# EAGLE board veter-cap (EAGLE 6.3)
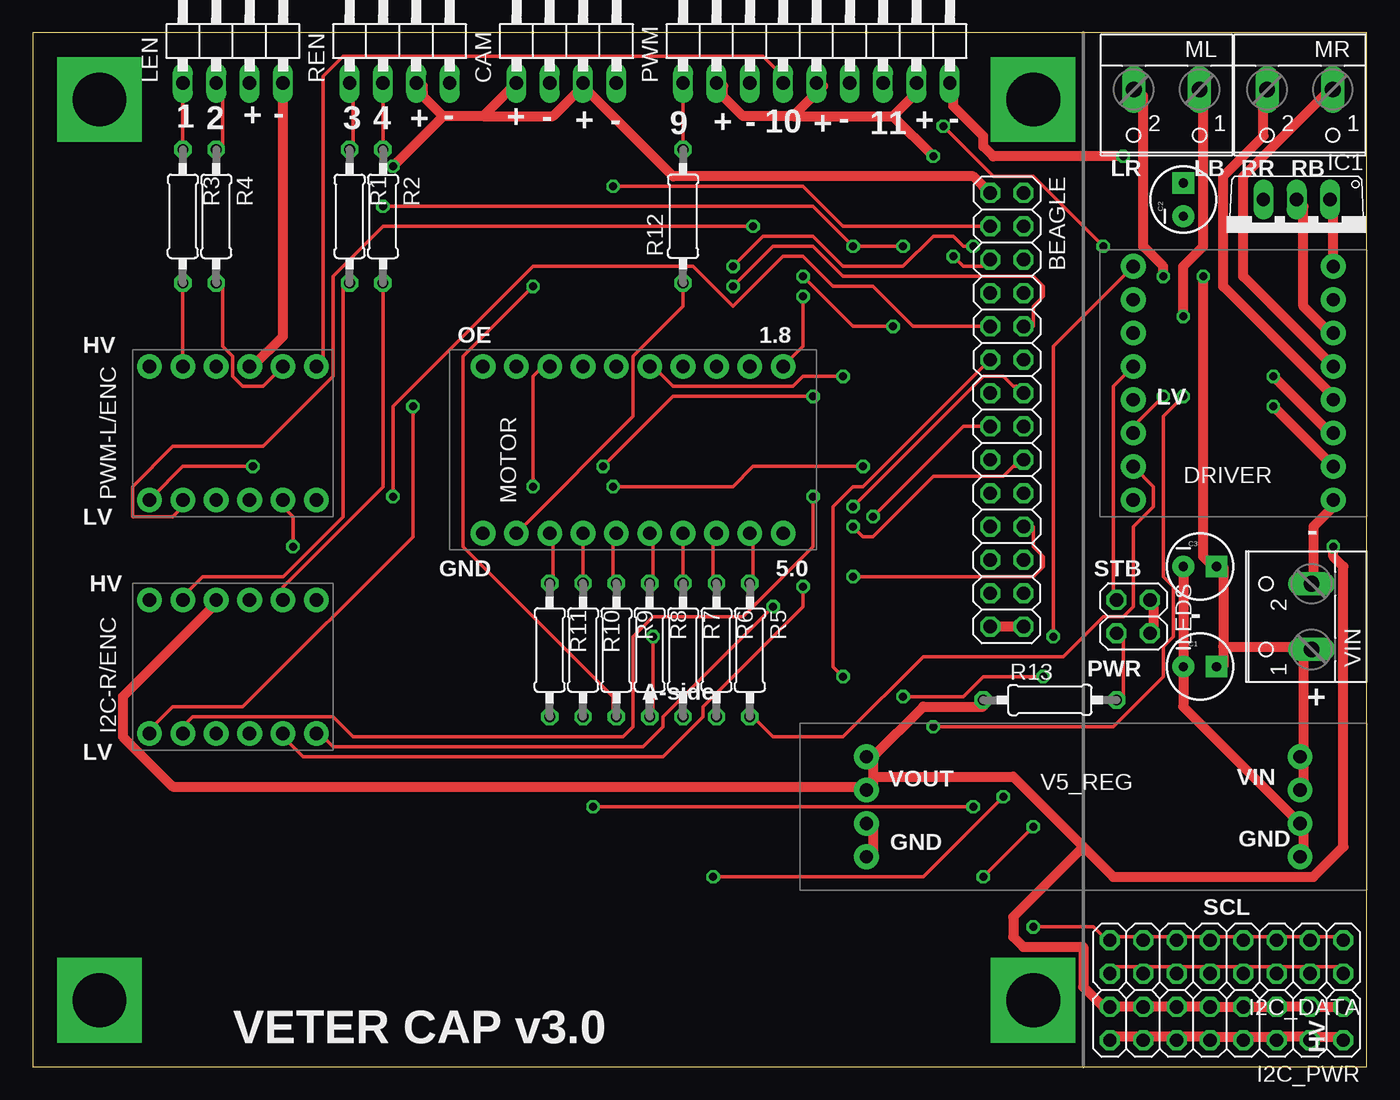
[diagram p0: board, top side]
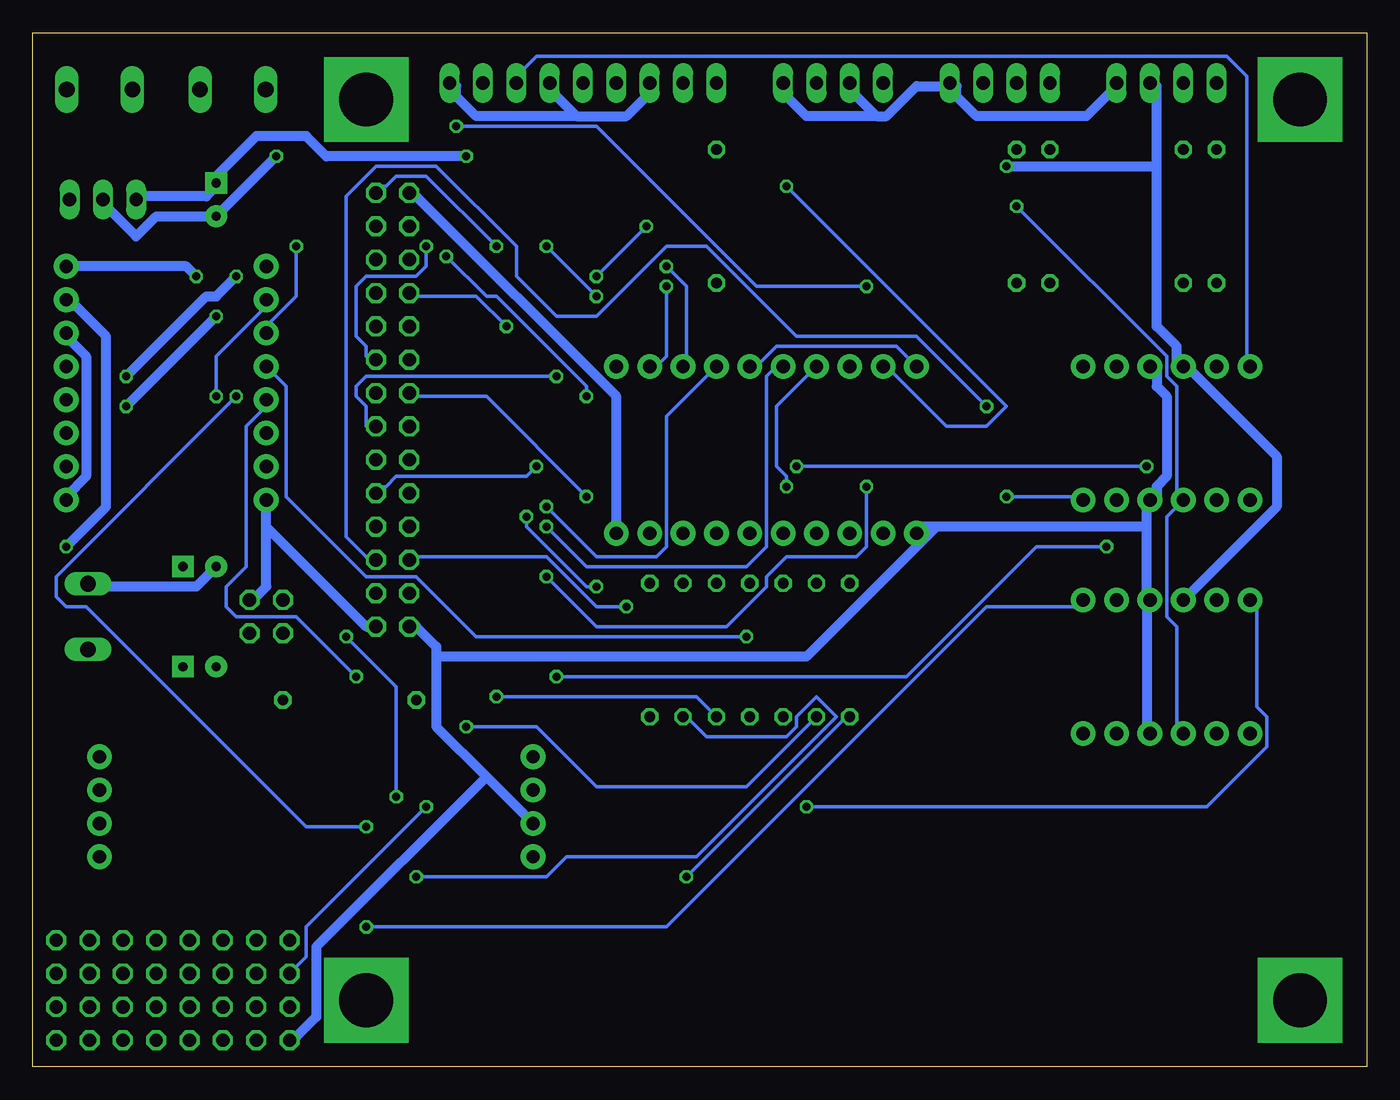
[diagram p1: board, bottom side, seen from below]

Size 101.6 x 78.74 mm. Coordinates in mm from the lower left corner, seen from the top.
Outline: 0,0 101.6,0 101.6,78.74 0,78.74 0,0
Copper layers (1*16): Top 0.035mm / dielectric 1.5mm / Bottom 0.035mm
Design rules "default": minimum track width 10mil, minimum drill 24mil, track to track 8mil, track to pad 8mil, pad to pad 8mil, via to via 8mil, smd to smd 8mil, copper to edge 40mil, drill to drill 12mil, minimum pad ring 10mil, minimum via ring 8mil, stop-mask expansion 4mil, vias tented up to drill 0mil, thermal gap 10mil
Net classes: 0 default: width 0.254 mm; 1 Supply: width 0.762 mm

## Footprints (pad centres in the part's own frame; a part is rotated, then mirrored left to right if it is on the bottom)
BEAGLE_PINH2X14 = drill 1.016 octagon: 1 1.27,16.51; 2 -1.27,16.51; 3 1.27,13.97; 4 -1.27,13.97; 5 1.27,11.43; 6 -1.27,11.43; 7 1.27,8.89; 8 -1.27,8.89; 9 1.27,6.35; 10 -1.27,6.35; 11 1.27,3.81; 12 -1.27,3.81; 13 1.27,1.27; 14 -1.27,1.27; 15 1.27,-1.27; 16 -1.27,-1.27; 17 1.27,-3.81; 18 -1.27,-3.81; 19 1.27,-6.35; 20 -1.27,-6.35; 21 1.27,-8.89; 22 -1.27,-8.89; 23 1.27,-11.43; 24 -1.27,-11.43; 25 1.27,-13.97; 26 -1.27,-13.97; 27 1.27,-16.51; 28 -1.27,-16.51
CPOL-RADIAL-10UF-25V = drill 0.7 pad 1.651 square: 1 1.27,0 | drill 0.7 pad 1.651: 2 -1.27,0
1X04/90 = drill 1.016 long: 1 -3.81,-3.81; 2 -1.27,-3.81; 3 1.27,-3.81; 4 3.81,-3.81
6612-BREAKOUT = drill 1.016 pad 1.88: 1 -7.62,-8.89; 2 -7.62,-6.35; 3 -7.62,-3.81; 4 -7.62,-1.27; 5 -7.62,1.27; 6 -7.62,3.81; 7 -7.62,6.35; 8 -7.62,8.89; 9 7.62,8.89; 10 7.62,6.35; 11 7.62,3.81; 12 7.62,1.27; 13 7.62,-1.27; 14 7.62,-3.81; 15 7.62,-6.35; 16 7.62,-8.89
BOB-08745-BREAKOUT = drill 1.016 pad 1.88: 1 -5.08,-6.35; 2 -5.08,-3.81; 3 -5.08,-1.27; 4 -5.08,1.27; 5 -5.08,3.81; 6 -5.08,6.35; 7 5.08,6.35; 8 5.08,3.81; 9 5.08,1.27; 10 5.08,-1.27; 11 5.08,-3.81; 12 5.08,-6.35
2X08 = drill 1.016 octagon: 1 -8.89,-1.27; 2 -8.89,1.27; 3 -6.35,-1.27; 4 -6.35,1.27; 5 -3.81,-1.27; 6 -3.81,1.27; 7 -1.27,-1.27; 8 -1.27,1.27; 9 1.27,-1.27; 10 1.27,1.27; 11 3.81,-1.27; 12 3.81,1.27; 13 6.35,-1.27; 14 6.35,1.27; 15 8.89,-1.27; 16 8.89,1.27
TO220V = drill 1.016 long: 1 -2.54,-2.54; 2 0,-2.54; 3 2.54,-2.54
2X02 = drill 1.016 octagon: 1 -1.27,-1.27; 2 -1.27,1.27; 3 1.27,-1.27; 4 1.27,1.27
BEAGLE-PAD = drill 4.1 pad 6.452 square: B4,1 0,0
W237-102 = drill 1.194 long: 1 -2.5,-1.27; 2 2.5,-1.27
TXB0108-BREAKOUT = drill 1.016 pad 1.88: 1 -6.35,-11.43; 2 -6.35,-8.89; 3 -6.35,-6.35; 4 -6.35,-3.81; 5 -6.35,-1.27; 6 -6.35,1.27; 7 -6.35,3.81; 8 -6.35,6.35; 9 -6.35,8.89; 10 -6.35,11.43; 11 6.35,11.43; 12 6.35,8.89; 13 6.35,6.35; 14 6.35,3.81; 15 6.35,1.27; 16 6.35,-1.27; 17 6.35,-3.81; 18 6.35,-6.35; 19 6.35,-8.89; 20 6.35,-11.43
1X09/90 = drill 1.016 long: 1 -10.16,-3.81; 2 -7.62,-3.81; 3 -5.08,-3.81; 4 -2.54,-3.81; 5 0,-3.81; 6 2.54,-3.81; 7 5.08,-3.81; 8 7.62,-3.81; 9 10.16,-3.81
0207/10 = drill 0.813 octagon: 1 -5.08,0; 2 5.08,0
D15V35F5S3-BREAKOUT = drill 1.016 pad 1.88: 1 -16.51,-3.81; 2 -16.51,-1.27; 3 -16.51,1.27; 4 -16.51,3.81; 5 16.51,3.81; 6 16.51,1.27; 7 16.51,-1.27; 8 16.51,-3.81

## Placement (x,y rotation side)
BEAGLE  EXPANSION  [BEAGLE_PINH2X14]  74.19,50.04 0 top
C1  100uF  [CPOL-RADIAL-10UF-25V]  88.9,30.48 0 top
C2  10uF  [CPOL-RADIAL-10UF-25V]  87.63,66.04 90 top
C3  10uF  [CPOL-RADIAL-10UF-25V]  88.9,38.1 0 top
CAM  PWR  [1X04/90]  40.64,78.74 0 top
DRIVER  TB6612FNG  [6612-BREAKOUT]  91.44,52.07 0 top
FRAME1  FRAME-LETTER  [CREATIVE_COMMONS]  -77.47,59.69 0 top  (outside the outline)
I2C-R/ENC  BOB-08745  [BOB-08745-BREAKOUT]  15.24,30.48 90 top
I2C_DATA  [2X08]  90.93,8.38 180 top
I2C_PWR  [2X08]  90.93,3.3 180 top
IC1  7805TV  [TO220V]  96.27,63.5 180 top
LEDS  5V LEDS  [2X02]  83.82,34.29 270 top
LEFT-BOTTOM  BEAGLE-PAD  [BEAGLE-PAD]  5.08,5.08 0 top
LEFT-TOP  BEAGLE-PAD  [BEAGLE-PAD]  5.08,73.66 0 top
LEN  LEFT  [1X04/90]  15.24,78.74 0 top
ML  LEFT  [W237-102]  86.36,73.15 180 top
MOTOR  TXB0108  [TXB0108-BREAKOUT]  45.72,46.99 270 top
MR  RIGHT  [W237-102]  96.52,73.15 180 top
PWM  PWM  [1X09/90]  59.69,78.74 0 top
PWM-L/ENC  BOB-08745  [BOB-08745-BREAKOUT]  15.24,48.26 90 top
R1  8K2  [0207/10]  24.13,64.77 270 top
R2  8K2  [0207/10]  26.67,64.77 270 top
R3  8K2  [0207/10]  11.43,64.77 270 top
R4  8K2  [0207/10]  13.97,64.77 270 top
R5  560  [0207/10]  54.61,31.75 270 top
R6  560  [0207/10]  52.07,31.75 270 top
R7  560  [0207/10]  49.53,31.75 270 top
R8  560  [0207/10]  46.99,31.75 270 top
R9  560  [0207/10]  44.45,31.75 270 top
R10  560  [0207/10]  41.91,31.75 270 top
R11  560  [0207/10]  39.37,31.75 270 top
R12  560  [0207/10]  49.53,64.77 90 top
R13  560  [0207/10]  77.47,27.94 0 top
REN  RIGHT  [1X04/90]  27.94,78.74 0 top
RIGHT-BOTTOM  BEAGLE-PAD  [BEAGLE-PAD]  76.2,5.08 0 top
RIGHT-TOP  BEAGLE-PAD  [BEAGLE-PAD]  76.2,73.66 0 top
V5_REG  D15V35F5S3  [D15V35F5S3-BREAKOUT]  80.01,19.81 180 top
VIN  INPUT  [W237-102]  96.14,34.29 90 top

## Library data of the parts
BEAGLE DRIVER I2C-R/ENC LEFT-BOTTOM LEFT-TOP MOTOR PWM-L/ENC RIGHT-BOTTOM RIGHT-TOP V5_REG = veter
C1-C3 = SparkFun-Passives
CAM I2C_DATA I2C_PWR LEDS LEN PWM REN = pinhead
FRAME1 = SparkFun-Aesthetics
IC1 = linear
ML MR VIN = con-wago-500; MPN: 237-102; OC_FARNELL: unknown; OC_NEWARK: 70K9898
R1-R13 = resistor

## Nets
+1V8: BEAGLE.1 I2C-R/ENC.4 MOTOR.10 PWM-L/ENC.4
+5V [Supply]: BEAGLE.2 CAM.1 CAM.3 DRIVER.10 I2C-R/ENC.9 I2C_PWR.1 I2C_PWR.3 I2C_PWR.5 I2C_PWR.7 I2C_PWR.9 I2C_PWR.11 I2C_PWR.13 I2C_PWR.15 LEN.3 MOTOR.11 PWM-L/ENC.9 R13.1 REN.3 V5_REG.7 V5_REG.8
+5V_SERVO [Supply]: C2.1 IC1.3 PWM.2 PWM.5 PWM.8
ENC1_143: PWM-L/ENC.8 R3.2
ENC2_158: PWM-L/ENC.11 R4.2
ENC3_162: I2C-R/ENC.8 R1.2
ENC4_161: I2C-R/ENC.11 R2.2
GPIO_130: BEAGLE.21 MOTOR.3
GPIO_131: BEAGLE.19 MOTOR.4
GPIO_132: BEAGLE.17 MOTOR.5
GPIO_133: BEAGLE.15 MOTOR.1 MOTOR.6
GPIO_134: BEAGLE.13 MOTOR.7
GPIO_135: BEAGLE.11 MOTOR.8
GPIO_136: BEAGLE.9 MOTOR.9
GPIO_143: BEAGLE.8 PWM-L/ENC.5
GPIO_144: BEAGLE.4 MOTOR.2
GPIO_145: BEAGLE.10 PWM-L/ENC.1
GPIO_146: BEAGLE.6 PWM-L/ENC.6
GPIO_158: BEAGLE.12 PWM-L/ENC.2
GPIO_161: BEAGLE.16 I2C-R/ENC.2
GPIO_162: BEAGLE.14 I2C-R/ENC.5
GPIO_168: BEAGLE.24 I2C-R/ENC.1
GPIO_183: BEAGLE.23 I2C-R/ENC.6
I2C_SCL: I2C-R/ENC.12 I2C_DATA.1 I2C_DATA.3 I2C_DATA.5 I2C_DATA.7 I2C_DATA.9 I2C_DATA.11 I2C_DATA.13 I2C_DATA.15
I2C_SDA: I2C-R/ENC.7 I2C_DATA.2 I2C_DATA.4 I2C_DATA.6 I2C_DATA.8 I2C_DATA.10 I2C_DATA.12 I2C_DATA.14 I2C_DATA.16
N$1: MOTOR.12 R5.1
N$2: MOTOR.13 R6.1
N$3: MOTOR.14 R7.1
N$4: MOTOR.15 R8.1
N$5: MOTOR.16 R9.1
N$6: MOTOR.17 R10.1
N$7: MOTOR.18 R11.1
N$8 [Supply]: DRIVER.14 ML.2
N$9 [Supply]: DRIVER.15 ML.1
N$10 [Supply]: DRIVER.13 MR.2
N$11 [Supply]: DRIVER.12 MR.1
N$12: R1.1 REN.1
N$13: R2.1 REN.2
N$14: LEN.1 R3.1
N$15: LEN.2 R4.1
N$16: MOTOR.19 R12.1
N$17: DRIVER.2 R5.2
N$18: DRIVER.3 R6.2
N$19: DRIVER.4 R7.2
N$20: DRIVER.5 LEDS.1 R8.2
N$21: DRIVER.6 R9.2
N$22: DRIVER.7 R10.2
N$23: DRIVER.8 R11.2
N$24: LEDS.3 R13.2
OE [Supply]: BEAGLE.27 BEAGLE.28 CAM.2 CAM.4 DRIVER.1 I2C-R/ENC.3 I2C-R/ENC.10 I2C_PWR.2 I2C_PWR.4 I2C_PWR.6 I2C_PWR.8 I2C_PWR.10 I2C_PWR.12 I2C_PWR.14 I2C_PWR.16 LEDS.2 LEDS.4 LEN.4 MOTOR.20 PWM-L/ENC.3 PWM-L/ENC.10 REN.4 V5_REG.5 V5_REG.6
PE [Supply]: C1.2 C2.2 C3.2 DRIVER.11 DRIVER.16 IC1.2 PWM.3 PWM.6 PWM.9 V5_REG.3 V5_REG.4 VIN.2
PWM9: PWM.1 R12.2
PWM10: PWM-L/ENC.12 PWM.4
PWM11: PWM-L/ENC.7 PWM.7
VBAT [Supply]: C1.1 C3.1 DRIVER.9 IC1.1 V5_REG.1 V5_REG.2 VIN.1

## Tracks (layer width: path | path; a pad name or v marks a point on that pad's centre or on a via)
+1V8  (via drill 0.61)
  Top 0.254: v66.29,62.48 v62.48,62.48 59.44,65.53 v26.67,65.53 | v58.67,58.67 58.67,54.86 MOTOR.10
  Bottom 0.254: I2C-R/ENC.4 14.48,25.91 14.48,33.53 15.24,34.29 15.24,41.91 14.48,42.67 PWM-L/ENC.4 14.48,43.43 14.48,51.82 15.24,52.58 15.24,54.1 v26.67,65.53 | v66.29,62.48 71.63,67.82 73.91,67.82 74.68,67.06 75.44,67.06 BEAGLE.1 | v58.67,58.67 v62.48,62.48
+5V  (via drill 0.61)
  Top 0.762: I2C_PWR.1 97.54,4.57 I2C_PWR.3 96.77,4.57 95.25,4.57 I2C_PWR.5 94.49,4.57 I2C_PWR.7 89.92,4.57 I2C_PWR.9 89.15,4.57 87.63,4.57 I2C_PWR.11 86.87,4.57 I2C_PWR.13 82.3,4.57 I2C_PWR.15 81.53,4.57 80.01,6.1 80.01,9.14 75.44,9.14 74.68,9.91 74.68,11.43 80.01,16.76 | 64.01,23.62 67.82,27.43 72.39,27.43 R13.1 | 64.01,23.62 V5_REG.8 64.01,23.62 | 64.01,23.62 64.01,22.1 | 64.01,22.1 64.01,21.34 V5_REG.7 63.25,21.34 10.67,21.34 6.86,25.15 6.86,28.19 13.72,35.05 I2C-R/ENC.9 | v99.06,39.62 99.06,38.86 99.82,38.1 99.82,16.76 97.54,14.48 82.3,14.48 80.01,16.76 | 80.01,16.76 74.68,22.1 64.01,22.1 | 31.24,72.39 29.72,73.91 29.72,74.68 REN.3 | 34.29,72.39 31.24,72.39 | 34.29,72.39 36.58,74.68 CAM.1 | 41.91,74.68 39.62,72.39 34.29,72.39 | 41.91,74.68 CAM.3 41.91,74.68 | 41.91,74.68 48.77,67.82 71.63,67.82 72.39,67.06 BEAGLE.2 | 31.24,72.39 v27.43,68.58
  Bottom 0.762: v99.06,39.62 96.01,42.67 96.01,55.63 98.3,57.91 99.06,57.91 DRIVER.10 | 16,68.58 16,56.39 14.48,54.86 14.48,53.34 PWM-L/ENC.9 13.72,53.34 6.86,46.48 6.86,42.67 13.72,35.81 I2C-R/ENC.9 | 16,68.58 16,74.68 LEN.3 | BEAGLE.2 72.39,66.29 57.15,51.05 57.15,41.15 MOTOR.11 | v27.43,68.58 16,68.58
+5V_SERVO  (via drill 0.61)
  Top 0.762: 57.91,72.39 54.1,72.39 52.58,73.91 52.58,74.68 PWM.2 | 57.91,72.39 60.2,74.68 PWM.5 | 65.53,72.39 67.06,73.91 67.06,74.68 PWM.8 | 57.91,72.39 65.53,72.39 | 65.53,72.39 v68.58,69.34
  Bottom 0.762: IC1.3 93.73,66.29 88.39,66.29 87.63,67.06 C2.1 87.63,67.82 84.58,70.87 80.77,70.87 79.25,69.34 v68.58,69.34
ENC1_143
  Top 0.254: PWM-L/ENC.8 11.43,59.44 R3.2
ENC2_158
  Top 0.254: PWM-L/ENC.11 17.53,51.82 16,51.82 15.24,52.58 15.24,54.1 14.48,54.86 14.48,59.44 R4.2
ENC3_162
  Top 0.254: R1.2 23.62,59.44 23.62,41.91 19.05,37.34 12.95,37.34 11.43,35.81 I2C-R/ENC.8
ENC4_161
  Top 0.254: R2.2 26.67,59.44 26.67,44.2 19.05,36.58 19.05,35.81 I2C-R/ENC.11
GPIO_130  (via drill 0.61)
  Top 0.254: v62.48,37.34 76.2,37.34 76.96,38.1 76.96,38.86 76.2,39.62 76.2,41.15 BEAGLE.21 | v38.1,44.2 38.1,52.58 38.86,53.34 MOTOR.3
  Bottom 0.254: v62.48,37.34 58.67,33.53 48.77,33.53 45.72,36.58 45.72,37.34 44.2,38.86 38.86,38.86 38.1,39.62 v38.1,44.2
GPIO_131  (via drill 0.61)
  Top 0.254: v63.25,45.72 54.86,45.72 53.34,44.2 v44.2,44.2
  Bottom 0.254: v63.25,45.72 64.01,44.96 73.91,44.96 74.68,44.2 75.44,44.2 BEAGLE.19 | v44.2,44.2 44.2,44.96 44.96,45.72 44.96,50.29 MOTOR.4
GPIO_132  (via drill 0.61)
  Top 0.254: v62.48,41.15 63.25,40.39 64.01,40.39 68.58,44.96 73.91,44.96 74.68,45.72 75.44,45.72 BEAGLE.17
  Bottom 0.254: v62.48,41.15 59.44,38.1 47.24,38.1 45.72,39.62 45.72,52.58 44.96,53.34 MOTOR.5
GPIO_133  (via drill 0.61)
  Top 0.254: v61.72,52.58 58.67,52.58 57.91,51.82 48.77,51.82 47.24,53.34 MOTOR.6
  Bottom 0.254: v61.72,52.58 76.2,52.58 76.96,51.82 76.96,51.05 76.2,50.29 76.2,48.77 BEAGLE.15 | MOTOR.1 35.81,54.86 44.96,54.86 46.48,53.34 MOTOR.6
GPIO_134  (via drill 0.61)
  Top 0.254: v62.48,42.67 72.39,52.58 73.91,52.58 74.68,51.82 75.44,51.82 BEAGLE.13
  Bottom 0.254: v62.48,42.67 58.67,38.86 54.1,38.86 53.34,39.62 53.34,49.53 MOTOR.7
GPIO_135  (via drill 0.61)
  Top 0.254: v71.63,62.48 70.87,62.48 70.1,63.25 68.58,63.25 66.29,60.96 61.72,60.96 59.44,63.25 55.63,63.25 v53.34,60.96
  Bottom 0.254: v71.63,62.48 71.63,60.96 72.39,60.2 76.2,60.2 76.96,59.44 76.96,55.63 76.2,54.86 76.2,54.1 BEAGLE.11 | v53.34,60.96 51.82,59.44 51.82,53.34 MOTOR.8
GPIO_136  (via drill 0.61)
  Top 0.254: v53.34,59.44 56.39,62.48 59.44,62.48 61.72,60.2 76.2,60.2 76.96,59.44 76.96,58.67 76.2,57.91 76.2,56.39 BEAGLE.9
  Bottom 0.254: v53.34,59.44 53.34,54.1 54.1,53.34 MOTOR.9
GPIO_143  (via drill 0.61)
  Top 0.254: v65.53,56.39 62.48,56.39 v58.67,60.2 | v54.86,64.01 26.67,64.01 22.86,60.2 22.86,52.58 17.53,47.24 10.67,47.24 7.62,44.2 7.62,41.91 10.67,41.91 11.43,42.67 PWM-L/ENC.5
  Bottom 0.254: v65.53,56.39 67.82,58.67 72.39,58.67 BEAGLE.8 | v54.86,64.01 v58.67,60.2
GPIO_144  (via drill 0.61)
  Top 0.254: v44.2,67.06 58.67,67.06 61.72,64.01 72.39,64.01 BEAGLE.4
  Bottom 0.254: v44.2,67.06 27.43,50.29 28.96,48.77 32,48.77 36.58,53.34 MOTOR.2
GPIO_145  (via drill 0.61)
  Top 0.254: v27.43,43.43 27.43,50.29 38.1,60.96 50.29,60.96 53.34,57.91 57.15,61.72 58.67,61.72 60.96,59.44 64.01,59.44 67.06,56.39 72.39,56.39 BEAGLE.10
  Bottom 0.254: v27.43,43.43 22.1,43.43 PWM-L/ENC.1
GPIO_146  (via drill 0.61)
  Top 0.254: v70.1,61.72 70.87,60.96 72.39,60.96 BEAGLE.6 | v59.44,51.05 48.77,51.05 v43.43,45.72 | v16.76,45.72 11.43,45.72 9.14,43.43 PWM-L/ENC.6
  Bottom 0.254: v70.1,61.72 67.06,58.67 66.29,58.67 59.44,51.82 v59.44,51.05 | v16.76,45.72 v43.43,45.72
GPIO_158  (via drill 0.61)
  Top 0.254: v61.72,29.72 60.96,30.48 60.96,42.67 62.48,44.2 63.25,44.2 72.39,53.34 BEAGLE.12 | v19.81,39.62 19.81,41.91 19.05,42.67 PWM-L/ENC.2
  Bottom 0.254: v61.72,29.72 35.05,29.72 25.15,39.62 v19.81,39.62
GPIO_161  (via drill 0.61)
  Top 0.254: v64.01,41.91 70.87,48.77 72.39,48.77 BEAGLE.16 | v58.67,36.58 58.67,35.05 51.05,27.43 51.05,26.67 48.01,23.62 20.57,23.62 19.05,25.15 I2C-R/ENC.2
  Bottom 0.254: v64.01,41.91 64.01,41.15 59.44,36.58 v58.67,36.58
GPIO_162  (via drill 0.61)
  Top 0.254: v59.44,43.43 59.44,39.62 54.1,34.29 47.24,34.29 45.72,32.77 45.72,25.91 44.96,25.15 24.38,25.15 22.86,26.67 12.19,26.67 11.43,25.91 I2C-R/ENC.5
  Bottom 0.254: v59.44,43.43 67.06,51.05 72.39,51.05 BEAGLE.14
GPIO_168  (via drill 0.61)
  Top 0.254: v56.39,35.05 48.01,26.67 48.01,25.91 46.48,24.38 22.86,24.38 22.1,25.15 I2C-R/ENC.1
  Bottom 0.254: v56.39,35.05 58.67,35.05 62.48,38.86 72.39,38.86 BEAGLE.24
GPIO_183  (via drill 0.61)
  Top 0.254: v28.96,50.29 28.96,40.39 16,27.43 10.67,27.43 9.14,25.91 I2C-R/ENC.6
  Bottom 0.254: v28.96,50.29 34.29,55.63 43.43,55.63 50.29,62.48 53.34,62.48 58.67,57.15 61.72,57.15 64.77,60.2 64.77,62.48 70.87,68.58 75.44,68.58 77.72,66.29 77.72,40.39 76.2,38.86 BEAGLE.23
I2C_SCL  (via drill 0.61)
  Top 0.254: 92.2,9.91 89.92,9.91 I2C_DATA.9 89.15,9.91 87.63,9.91 I2C_DATA.11 86.87,9.91 84.58,9.91 | 92.2,9.91 I2C_DATA.7 92.2,9.91 | I2C_DATA.1 99.82,9.91 97.54,9.91 I2C_DATA.3 96.77,9.91 95.25,9.91 I2C_DATA.5 94.49,9.91 92.2,9.91 | 84.58,9.91 82.3,9.91 I2C_DATA.15 81.53,9.91 80.77,10.67 v76.2,10.67 | 84.58,9.91 I2C_DATA.13 84.58,9.91
  Bottom 0.254: v76.2,10.67 53.34,10.67 28.96,35.05 22.1,35.05 I2C-R/ENC.12
I2C_SDA  (via drill 0.61)
  Top 0.254: 92.2,7.62 89.92,7.62 I2C_DATA.10 89.15,7.62 87.63,7.62 I2C_DATA.12 86.87,7.62 84.58,7.62 | 92.2,7.62 I2C_DATA.8 92.2,7.62 | I2C_DATA.2 99.82,7.62 97.54,7.62 I2C_DATA.4 96.77,7.62 95.25,7.62 I2C_DATA.6 94.49,7.62 92.2,7.62 | 84.58,7.62 82.3,7.62 I2C_DATA.16 | 84.58,7.62 I2C_DATA.14 84.58,7.62 | v71.63,19.81 v42.67,19.81
  Bottom 0.254: v42.67,19.81 12.19,19.81 7.62,24.38 7.62,26.67 8.38,27.43 8.38,35.05 I2C-R/ENC.7 | v71.63,19.81 80.77,10.67 80.77,8.38 81.53,7.62 I2C_DATA.16
N$1
  Top 0.254: R5.1 54.86,37.34 54.86,40.39 MOTOR.12
N$2
  Top 0.254: R6.1 51.82,37.34 51.82,40.39 MOTOR.13
N$3
  Top 0.254: R7.1 49.53,37.34 49.53,40.39 MOTOR.14
N$4
  Top 0.254: R8.1 47.24,37.34 47.24,40.39 MOTOR.15
N$5
  Top 0.254: R9.1 44.2,37.34 44.2,40.39 MOTOR.16
N$6
  Top 0.254: R10.1 41.91,37.34 41.91,40.39 MOTOR.17
N$7
  Top 0.254: R11.1 39.62,37.34 39.62,40.39 MOTOR.18
N$8  (via drill 0.61)
  Top 0.762: v86.11,60.2 86.11,60.96 84.58,62.48 84.58,73.91 ML.2 | v94.49,52.58 99.06,48.01 DRIVER.14
  Bottom 0.762: v86.11,60.2 87.63,58.67 88.39,58.67 v94.49,52.58
N$9  (via drill 0.61)
  Top 0.762: v87.63,57.15 87.63,60.96 89.15,62.48 89.15,73.91 ML.1 | DRIVER.15 v94.49,50.29
  Bottom 0.762: v94.49,50.29 v87.63,57.15
N$10
  Top 0.762: MR.2 93.73,73.91 93.73,70.87 90.68,67.82 90.68,59.44 99.06,51.05 DRIVER.13
N$11
  Top 0.762: DRIVER.12 92.2,60.2 92.2,67.82 98.3,73.91 MR.1
N$12
  Top 0.254: R1.1 24.38,70.1 24.38,74.68 REN.1
N$13
  Top 0.254: R2.1 26.67,70.1 26.67,74.68 REN.2
N$14
  Top 0.254: R3.1 11.43,70.1 11.43,74.68 LEN.1
N$15
  Top 0.254: R4.1 14.48,70.1 14.48,74.68 LEN.2
N$16
  Top 0.254: R12.1 49.53,59.44 49.53,57.91 45.72,54.1 45.72,49.53 37.34,41.15 MOTOR.19
N$17
  Top 0.254: DRIVER.2 85.34,44.2 85.34,42.67 83.82,41.15 83.82,35.05 83.06,34.29 81.53,34.29 78.49,31.24 67.82,31.24 61.72,25.15 56.39,25.15 54.86,26.67 R5.2
N$18  (via drill 0.61)
  Top 0.254: v76.2,18.29 v72.39,14.48 | v86.11,51.05 83.82,48.77 DRIVER.3
  Bottom 0.254: v72.39,14.48 62.48,14.48 60.96,16 51.05,16 40.39,26.67 41.91,28.19 43.43,26.67 43.43,25.91 44.2,25.15 50.29,25.15 51.82,26.67 R6.2 | v76.2,18.29 80.77,18.29 97.54,35.05 99.06,35.05 99.82,35.81 99.82,37.34 v86.11,51.05
N$19  (via drill 0.61)
  Top 0.254: v66.29,28.19 70.87,28.19 72.39,29.72 v76.96,29.72
  Bottom 0.254: R7.2 51.05,28.19 v66.29,28.19 | v76.96,29.72 81.53,34.29 86.11,34.29 86.87,35.05 86.87,36.58 85.34,38.1 85.34,48.77 83.82,50.29 DRIVER.4
N$20  (via drill 0.61)
  Top 0.254: v47.24,32.77 47.24,26.67 R8.2 | DRIVER.5 82.3,51.82 82.3,35.81 LEDS.1
  Bottom 0.254: v47.24,32.77 67.82,32.77 72.39,37.34 76.2,37.34 82.3,43.43 82.3,51.82 DRIVER.5
N$21  (via drill 0.61)
  Top 0.254: v38.1,59.44 32.77,54.1 32.77,39.62 44.2,28.19 44.2,26.67 R9.2 | v69.34,71.63 73.15,67.82 76.2,67.82 v81.53,62.48
  Bottom 0.254: v38.1,59.44 46.48,59.44 58.67,71.63 v69.34,71.63 | v81.53,62.48 81.53,58.67 83.82,56.39 DRIVER.6
N$22  (via drill 0.61)
  Top 0.254: v68.58,25.91 82.3,25.91 86.11,29.72 86.11,32 86.87,32.77 86.87,36.58 86.11,37.34 86.11,49.53 v87.63,51.05
  Bottom 0.254: R10.2 47.24,21.34 58.67,21.34 63.25,25.91 v68.58,25.91 | v87.63,51.05 87.63,54.1 83.82,57.91 DRIVER.7
N$23  (via drill 0.61)
  Top 0.254: v51.82,14.48 67.82,14.48 v73.91,20.57 | v77.72,32.77 77.72,54.86 DRIVER.8
  Bottom 0.254: v51.82,14.48 39.62,26.67 R11.2 | v73.91,20.57 73.91,28.96 v77.72,32.77
N$24
  Top 0.254: R13.2 83.06,28.19 83.06,32.77 LEDS.3
OE
  Top 0.762: I2C_PWR.2 99.82,2.29 97.54,2.29 I2C_PWR.4 96.77,2.29 95.25,2.29 I2C_PWR.6 94.49,2.29 92.2,2.29 | 84.58,2.29 82.3,2.29 I2C_PWR.16 | 84.58,2.29 I2C_PWR.14 84.58,2.29 | 92.2,2.29 89.92,2.29 I2C_PWR.10 89.15,2.29 87.63,2.29 I2C_PWR.12 86.87,2.29 84.58,2.29 | 92.2,2.29 I2C_PWR.8 92.2,2.29 | V5_REG.5 64.01,16 64.01,18.29 V5_REG.6 | BEAGLE.28 73.15,33.53 75.44,33.53 BEAGLE.27 | LEDS.4 85.34,33.53 85.34,35.05 LEDS.2 | 16.76,53.34 19.05,55.63 19.05,74.68 LEN.4 | 16.76,53.34 PWM-L/ENC.10 | 16.76,53.34 PWM-L/ENC.10 | 16.76,53.34 PWM-L/ENC.10 | 34.29,41.15 MOTOR.20 34.29,41.15 | 16.76,43.43 PWM-L/ENC.3 16.76,43.43 | 16.76,35.81 I2C-R/ENC.10 16.76,35.81
  Bottom 0.762: 83.82,41.15 83.82,36.58 84.58,35.81 LEDS.2 | 83.82,41.15 83.82,42.67 DRIVER.1 | 83.82,41.15 76.2,33.53 BEAGLE.27 | 67.06,22.1 70.87,25.91 70.87,31.24 | 67.06,22.1 64.01,19.05 V5_REG.6 | 70.87,31.24 70.87,32 72.39,33.53 BEAGLE.28 | 67.06,22.1 80.01,9.14 80.01,3.81 81.53,2.29 I2C_PWR.16 | I2C-R/ENC.3 16.76,25.91 16.76,35.05 I2C-R/ENC.10 16.76,35.81 16.76,41.15 | 16.76,41.15 16.76,42.67 PWM-L/ENC.3 16,43.43 16,44.2 15.24,44.96 15.24,51.05 16,51.82 16,53.34 PWM-L/ENC.10 | 16.76,41.15 32.77,41.15 | 32.77,41.15 34.29,41.15 MOTOR.20 | 37.34,72.39 36.58,72.39 34.29,74.68 32,74.68 REN.4 31.24,74.68 31.24,73.91 29.72,72.39 21.34,72.39 19.05,74.68 LEN.4 | 37.34,72.39 39.62,74.68 CAM.2 | 37.34,72.39 42.67,72.39 44.2,73.91 44.2,74.68 CAM.4 | 70.87,31.24 42.67,31.24 32.77,41.15
PE  (via drill 0.61)
  Top 0.762: VIN.2 97.54,37.34 97.54,41.15 99.06,42.67 DRIVER.16 | V5_REG.4 96.77,16 96.77,18.29 V5_REG.3 96.01,19.05 87.63,27.43 C1.2 C3.2 | IC1.2 96.77,65.53 96.77,57.91 99.06,55.63 DRIVER.11 | v83.06,69.34 73.15,69.34 72.39,70.1 72.39,70.87 70.1,73.15 70.1,74.68 PWM.9
  Bottom 0.762: C3.2 89.15,36.58 96.77,36.58 VIN.2 | 60.2,72.39 56.39,72.39 54.86,73.91 54.86,74.68 PWM.3 | 60.2,72.39 62.48,74.68 PWM.6 | 60.2,72.39 67.82,72.39 69.34,73.91 69.34,74.68 PWM.9 | IC1.2 96.01,65.53 93.73,63.25 92.2,64.77 C2.2 v83.06,69.34 | DRIVER.16 99.06,43.43 97.54,44.96 97.54,54.1 99.06,55.63 DRIVER.11
PWM9
  Top 0.254: R12.2 49.53,70.1 49.53,74.68 PWM.1
PWM10
  Top 0.254: PWM.4 57.15,75.44 55.63,76.96 23.62,76.96 22.1,75.44 22.1,53.34 PWM-L/ENC.12
PWM11
  Bottom 0.254: PWM.7 64.77,75.44 63.25,76.96 10.67,76.96 9.14,75.44 9.14,53.34 PWM-L/ENC.7
VBAT  (via drill 0.61)
  Top 0.762: DRIVER.9 99.06,65.53 IC1.1 | 96.77,23.62 96.77,21.34 V5_REG.2 | 96.77,23.62 V5_REG.1 96.77,23.62 | 90.68,32 90.68,38.1 C3.1 89.92,38.1 89.15,38.86 v89.15,60.2 | 90.68,32 90.68,30.48 C1.1 | 90.68,32 96.77,32 VIN.1 96.77,31.24 96.77,23.62
  Bottom 0.762: DRIVER.9 89.92,60.96 v89.15,60.2

## Text on the board
tNames: 1 | + | - | - | + | - | 2 | 3 | 4 | + | + | - | 9 | + | - | 10 | + | - | 11 | + | - | LR | LB | RR | RB | OE | 1.8 | HV | LV | LV | - | GND | 5.0 | STB | HV | - | PWR | A-side | + | LV | VOUT | VIN | GND | GND | SCL | HV | VETER CAP v3.0
bDocu: +